# Altium PCB Sensor_LoRa_Moist.PCBDOC (part 2 of 2)
Units mil, origin at the board's own origin, x right, y up, seen from the top; angles counter-clockwise.
Board outline 1535.43 x 8503.94 mil, 2 copper layers (Top, Bot), stack 63.824 mil thick; 60 components, 36 nets, 214 pads, 308 vias.
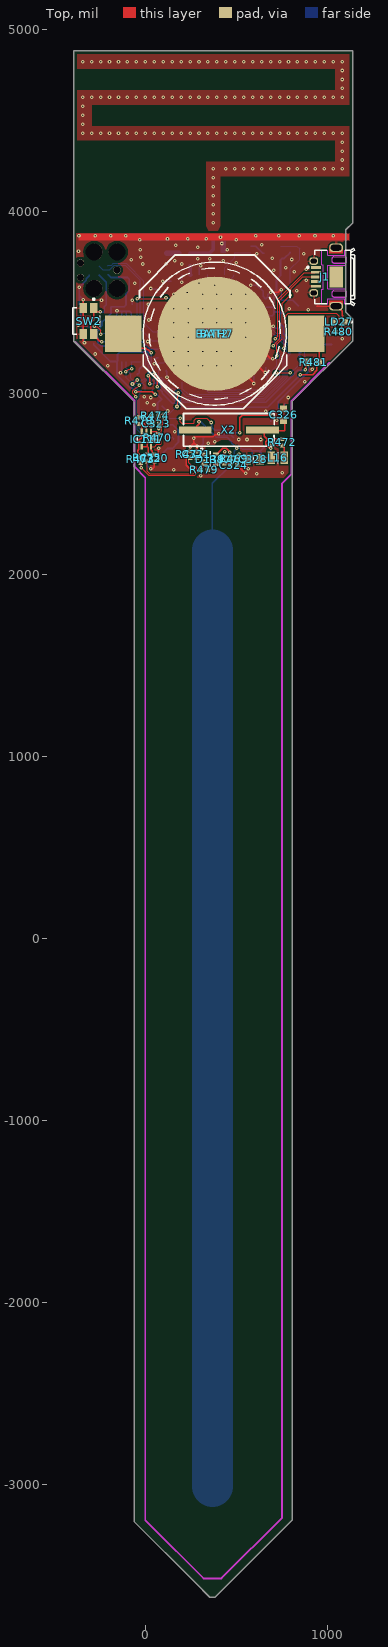
[diagram p0: Top view]

## Via types
v1: diameter 19.68, hole 7.87, Top to Bot, tented both sides, 299 vias
v2: diameter 19.68, hole 7.87, Top to Bot, 9 vias

## Nets (pads, with @x,y where several pads share a name; then routed paths per layer and width w, separated by ;. In a path a pad name is that pad's centre, name@x,y a point inside that pad or via, vN(x,y) a via of type N, cw(c..) or ccw(c..) an arc to the next point about the centre after c; other vN are vias at no path point) (continued)
PROBE: (continued)
  Bot w7.87: 369.09,2135.83 369.09,2502.77 464.78,2598.46 v1(464.78,2675.2)
  Bot w226.77: 369.09,-3011.81 369.09,2135.83
RST: C329.2 IC2.29 J2.3 R1.2 SW2.1 SW2.1' | length 928.4
  Top w8: SW2.1' -292.95,3334.29 SW2.1'@-299.84,3334.29 ; SW2.1 SW2.1@-283.46,3464.2 ; v1(-247.64,3447.53) -266.8,3447.53 SW2.1@-283.46,3464.2 ; v1(-240.36,3282.97) -242.6,3285.2 -250.76,3285.2 SW2.1'@-299.84,3334.29 ; SW2.1'@-299.84,3334.29 -299.84,3387.48 -283.46,3403.86 SW2.1@-283.46,3464.2
  Bot w8: C329.2 -283.13,3468.84 -283.13,3449.13 -278.45,3444.45 -269.89,3444.45 -269.04,3445.29 -249.88,3445.29 v1(-247.64,3447.53) -245.63,3445.52 -229.88,3445.52 -225.2,3450.2 R1.2 ; J2.3 -215.1,3609.99 -215.1,3485.29 R1.2@-225.2,3475.2 ; v1(-240.36,3282.97) -15.73,3282.97 26,3241.24 IC2.29
SCL1: IC1.6 IC2.13 IC3.4 IC109.6 R468.2 | length 1943.5
  Top w5: v2(-51.99,2979.68) -51.99,2980.78 -69.58,2998.37 -69.58,3013.82 -59.42,3023.98 -56.49,3023.98 -51.44,3029.03 -46.81,3029.03 -34.56,3041.28 -33.87,3041.28 v2(-33.87,3041.97)
  Bot w5: IC109.6 -105.31,3137.34 -102.39,3134.41 -99.37,3134.41 -89.21,3124.25 -89.21,3110.67 -80.71,3102.17 -80.71,3081.67 -65.88,3066.84 -63.4,3066.84 -50.88,3054.33 -33.59,3054.33 ; v2(-51.99,2979.68) -49.18,2976.87 -49.18,2965.48 -44.64,2960.94 -44.64,2799.22 25.24,2729.33 61.21,2729.33 62.57,2730.69 72.99,2730.69 81.31,2739.02 IC3.4 ; v2(-33.87,3041.97) -33.59,3042.25 -33.59,3054.33 ; IC1.6 -0.99,3039.02 -16.3,3054.33 ; IC2.13 670.22,3377.46 718.96,3328.72 730.61,3328.72 798.17,3261.16 798.17,3214.61 779.2,3195.64 779.2,3083.82 657.34,2961.96 210.65,2961.96 201.23,2971.38 165.36,2971.38 99.27,3037.47 99.27,3047.93 79.93,3067.28 71.43,3067.28 70.35,3068.36 -2.27,3068.36 -16.3,3054.33 ; -33.59,3054.33 -16.3,3054.33
SDA1: IC1.5 IC2.14 IC3.6 IC109.5 R467.2 | length 2028.7
  Top w5: v1(-106.55,3117.07) -91.56,3132.06 -75.13,3132.06 v1(-74.22,3132.97) ; v1(-70.58,3049.5) -68.9,3051.18 -64.19,3051.18 v1(-43.7,3071.67)
  Bot w5: v1(-106.55,3117.07) -105.31,3115.83 -105.31,3085.34 -70.03,3050.05 v1(-70.58,3049.5) -37.68,3016.6 IC1.5 -20.67,3008.6 -34.64,2994.63 -34.64,2805.39 31.42,2739.33 47.32,2739.33 56.97,2748.98 56.97,2756.78 67.38,2767.19 137.79,2767.19 156.12,2748.86 IC3.6 ; v1(-74.22,3132.97) -74.22,3167.72 IC109.5 -28.54,3173.23 R467.2 ; v1(-43.7,3071.67) -13.1,3071.67 -6.41,3078.36 74.49,3078.36 75.57,3077.28 84.07,3077.28 109.27,3052.08 109.27,3041.61 169.5,2981.38 205.37,2981.38 214.79,2971.96 653.2,2971.96 769.2,3087.96 769.2,3200.02 788.17,3218.99 788.17,3257.01 728.54,3316.64 710.15,3316.64 696.57,3330.22 IC2.14
SENS_ENn: IC2.24 R466.1 T39.1 | length 801.5
  Top w5: v1(718.96,3110.67) 719.31,3111.02 796.19,3111.02 v1(796.54,3111.37)
  Bot w5: IC2.24 307.32,3049.41 307.32,3041.54 345.42,3003.44 642.25,3003.44 718.96,3080.15 v1(718.96,3110.67) ; v1(796.54,3111.37) 800.34,3111.37 840.06,3151.09 T39.1 855.81,3151.09 866.1,3161.38 866.1,3175.23 876.1,3185.23 876.1,3237.03 906,3266.93 R466.1
SENS_OUT: C323.2 IC2.7 R474.1 | length 1254.6
  Top w5: v1(23.88,2842.52) 25.35,2841.05 32.77,2841.05 42.13,2831.69 57.07,2846.63 ; 57.07,2846.65 61.46,2851.05 61.46,2863.63 R474.1@66.93,2869.09 ; R474.1 80.32,2883.66 v1(99.57,2883.66) ; v1(174.43,2926.04) 177.12,2928.73 177.12,2945.52 179.62,2948.02 179.62,3001.46 v1(180.25,3002.09)
  Bot w5: v1(99.57,2883.66) 129.91,2883.66 172.29,2926.04 v1(174.43,2926.04) ; v1(180.25,3002.09) 154.9,3027.44 137.59,3027.44 119.27,3045.75 119.27,3056.22 88.21,3087.28 79.72,3087.28 74.8,3092.19 74.8,3163.94 77.73,3166.87 100.55,3166.87 127.73,3194.04 161.16,3194.04 187.37,3220.25 187.37,3469.96 284.35,3566.95 410.09,3566.95 485.76,3642.61 485.76,3647.75 IC2.7
SWCLK: IC2.30 J2.4 | length 674.9
  Bot w5: J2.4 -232.85,3677.74 -196.36,3677.74 -171.31,3702.79 -110.27,3702.79 -27.36,3619.88 -27.36,3354.13 38.28,3288.49 IC2.30
SWD: IC2.31 J2.2 | length 573.7
  Bot w5: J2.2 -204.24,3702.45 -185.78,3702.45 -175.45,3712.79 -106.13,3712.79 -9.19,3615.85 -9.19,3385.59 40.67,3335.73 IC2.31
USB_N: IC2.27 J1.2 | length 1424.2
  Top w5: v1(714.76,3299.3) 728.19,3312.73 728.19,3515.46 874.68,3661.95 931.14,3661.95 J1.2@933.07,3663.88
  Bot w5: IC2.27 156.44,3050.69 180.43,3026.7 180.43,3026.43 224.84,2982.02 232.98,2982.02 233.04,2981.96 649.06,2981.96 757.76,3090.66 757.76,3209.62 778.17,3230.03 778.17,3252.87 732.11,3298.94 715.13,3298.94 v1(714.76,3299.3)
USB_P: IC2.26 J1.3 | length 1328.8
  Top w5: v1(704.66,3259.04) 704.66,3263.02 713.71,3272.06 713.71,3273.72 738.19,3298.2 738.19,3511.32 865.16,3638.29 J1.3
  Bot w5: IC2.26 203.68,3024.4 236.06,2992.02 644.98,2992.02 739.19,3086.24 739.19,3211.82 721.85,3229.16 721.85,3241.86 v1(704.66,3259.04)
VCC: C319.2 C320.1 IC110.14 IC111.5 T39.3 | length 1514.1
  Top w5: IC111.5 52.44,2705.71 64.05,2717.32 84.21,2717.32 88.6,2721.72 88.6,2793.31 91.16,2795.87 91.16,2810.72 96.48,2816.03 96.48,2848.28 105.46,2857.27 v1(105.46,2859.69) ; v1(192.86,2861.24) 192.86,2841.63 200.35,2834.13 265.4,2834.13 268.33,2837.06 268.33,2849.37 280.2,2861.24 338.81,2861.24 v1(362.13,2837.92)
  Top w7.87: IC111.5 31.5,2685.04 37.4,2679.13 37.4,2672.24 C320.1 C320.1@51.81,2659.45 ; v1(519.09,2781.57) 519.09,2864.5 531.94,2877.34 682.46,2877.34 v1(688.78,2883.66)
  Bot w5: v1(105.46,2859.69) 106.24,2860.47 192.08,2860.47 v1(192.86,2861.24)
  Bot w7.87: v1(362.13,2837.92) 364.09,2835.95 364.09,2816.27 368.03,2812.33 368.03,2808.31 381.94,2794.39 462.63,2794.39 475.45,2781.57 v1(519.09,2781.57) ; IC110.14 v1(688.78,2883.66) 698.15,2893.03 729.65,2893.03 C319.2 730.32,2952.49 898.49,3120.67 898.49,3180.98 906,3188.49 T39.3
pads on no net: IC1.1 IC1.2 IC1.3 IC1.7 IC2.5 IC2.8 IC2.9 IC2.16 IC2.19 IC2.20 IC2.21 IC2.23 IC2.25 IC2.32 IC2.33 IC2.34 IC3.5 IC110.8 IC110.9 IC110.10 IC110.11 IC110.12 IC110.13 J1.1 J1.4 J1.PastePad J2.0 J2.6

## Polygon pours and split planes (outlines as drawn)
GND on Bot "Bot-GND" (solid, remove dead copper, pour order 0): 0,2534.45 0,-3198.82 319.88,-3518.7 418.31,-3518.7 762.8,-3174.21 762.8,2514.76 802.17,2554.13 806.92,2965.04 1129.32,3287.45 1127.87,3391.65 1086.15,3428.67 1088.21,3877.95 24.61,3877.95 -380.91,3877.95 -380.91,3303.81 -62.15,2981.78 -62.15,2596.6
ANT on Bot "NONET_L-01_P-001" (solid, remove dead copper, pour order 3): -374.02,4862.2 1122.05,4862.2 1122.05,4586.61 -295.28,4586.61 -295.28,4468.5 1122.05,4468.5 1122.05,4192.91 413.39,4192.91 413.39,3917.32 383.86,3868.11 364.17,3868.11 334.65,3917.32 334.65,4271.65 1043.31,4271.65 1043.31,4389.76 -374.02,4389.76 -374.02,4665.35 1043.31,4665.35 1043.31,4783.46 -374.02,4783.46
GND on Top "Top-GND" (solid, remove dead copper, pour order 2): -63.98,2534.45 806.77,2534.45 806.77,2968.57 1129.32,3291.12 1127.87,3391.65 1086.15,3428.67 1088.21,3877.95 24.61,3877.95 -380.91,3877.95 -380.91,3271.51 -63.98,2954.58
ANT on Top "NONET_L-01_P-001" (solid, pour order 4): -374.02,4862.2 1122.05,4862.2 1122.05,4586.61 -295.28,4586.61 -295.28,4468.5 1122.05,4468.5 1122.05,4192.91 413.39,4192.91 413.39,3917.32 383.86,3868.11 364.17,3868.11 334.65,3917.32 334.65,4271.65 1043.31,4271.65 1043.31,4389.76 -374.02,4389.76 -374.02,4665.35 1043.31,4665.35 1043.31,4783.46 -374.02,4783.46

## Keep-outs
KeepOutLayer:
  lines w10: -383.86,3282.48 -59.06,2957.68 -59.06,2593.5 0,2534.45 0,-3198.82 24.61,-3223.43 319.88,-3518.7 418.31,-3518.7 751.98,-3185.03 751.98,2503.95 802.17,2554.13 802.17,2954.92 1012.6,3165.36

## Other copper
Top:
  rectangle net GND: -368.56,3838.58 1122.05,3877.95
Bot:
  rectangle net GND: 413.39,3769.69 442.91,3848.43
  rectangle net GND: 413.39,3838.58 1122.05,3877.95
  rectangle net GND: -88.58,3838.58 334.65,3877.95

## Silkscreen, mask and mechanical layers (free items; w line width, h text height)
BottomOverlay:
  text "6" at -335.17,3751.04 h40
  text "1" at -196.85,3572.83 h40
Mechanical1:
  drawing of 209 lines, arcs and shapes, not listed
  text "Board Layer Stack" at 1348.27,1243.01 h60 r90
  text "Constant" at 1348.27,673.15 h60 r90
  text "3.5" at 1588.27,673.15 h60 r90
  text "4.8" at 1828.27,673.15 h60 r90
  text "3.5" at 2068.27,673.15 h60 r90
  text "Thickness" at 1348.27,23.31 h60 r90
  text "0,010mm" at 1588.27,23.31 h60 r90
  text "0,036mm" at 1708.27,23.31 h60 r90
  text "1,550mm" at 1828.27,23.31 h60 r90
  text "0,036mm" at 1948.27,23.31 h60 r90
  text "0,010mm" at 2068.27,23.31 h60 r90
  text "Material" at 1348.27,-836.46 h60 r90
  text "Solder Resist" at 1588.27,-836.46 h60 r90
  text "FR-4" at 1828.27,-836.46 h60 r90
  text "Solder Resist" at 2068.27,-836.46 h60 r90
  text "Name" at 1348.27,-1706.22 h60 r90
  text "TopOverlay" at 1468.27,-1706.22 h60 r90
  text "TopSolder" at 1588.27,-1706.22 h60 r90
  text "Top" at 1708.27,-1706.22 h60 r90
  text "Dielectric1" at 1828.27,-1706.22 h60 r90
  text "Bot" at 1948.27,-1706.22 h60 r90
  text "BottomSolder" at 2068.27,-1706.22 h60 r90
  text "BottomOverlay" at 2188.27,-1706.22 h60 r90
  text "Layer" at 1348.27,-2116.13 h60 r90
  text "1" at 1708.27,-2116.13 h60 r90
  text "2" at 1948.27,-2116.13 h60 r90
Mechanical2:
  lines w10: -39.37,-3172.39 787.4,-3172.39 ; 369.09,-3622.05 369.09,2588.58

## Text inside footprints (layer, text, board x,y; h text height)
IC2: Top Courtyard "RAK4260" at 367.07,3353.84 h33.46 r90
J1: DrillDrawing "r0.2" at 990.16,3728.84 h39.37 r90; DrillDrawing "1.87" at 1108.71,3624.14 h39.37 r180; DrillDrawing "0.85" at 1211.25,3579.15 h39.37 r90; Mechanical8 "PCB end" at 1138.78,3469 h19.68 r90